# Altium PCB PCB1.PcbDoc (part 1 of 2)
Units mm, origin at the board's own origin, x right, y up, seen from the top; angles counter-clockwise.
Board outline 42.41 x 25.14 mm, 2 copper layers (Top Layer, Bottom Layer); 357 components, 11 nets, 765 pads, 0 vias.
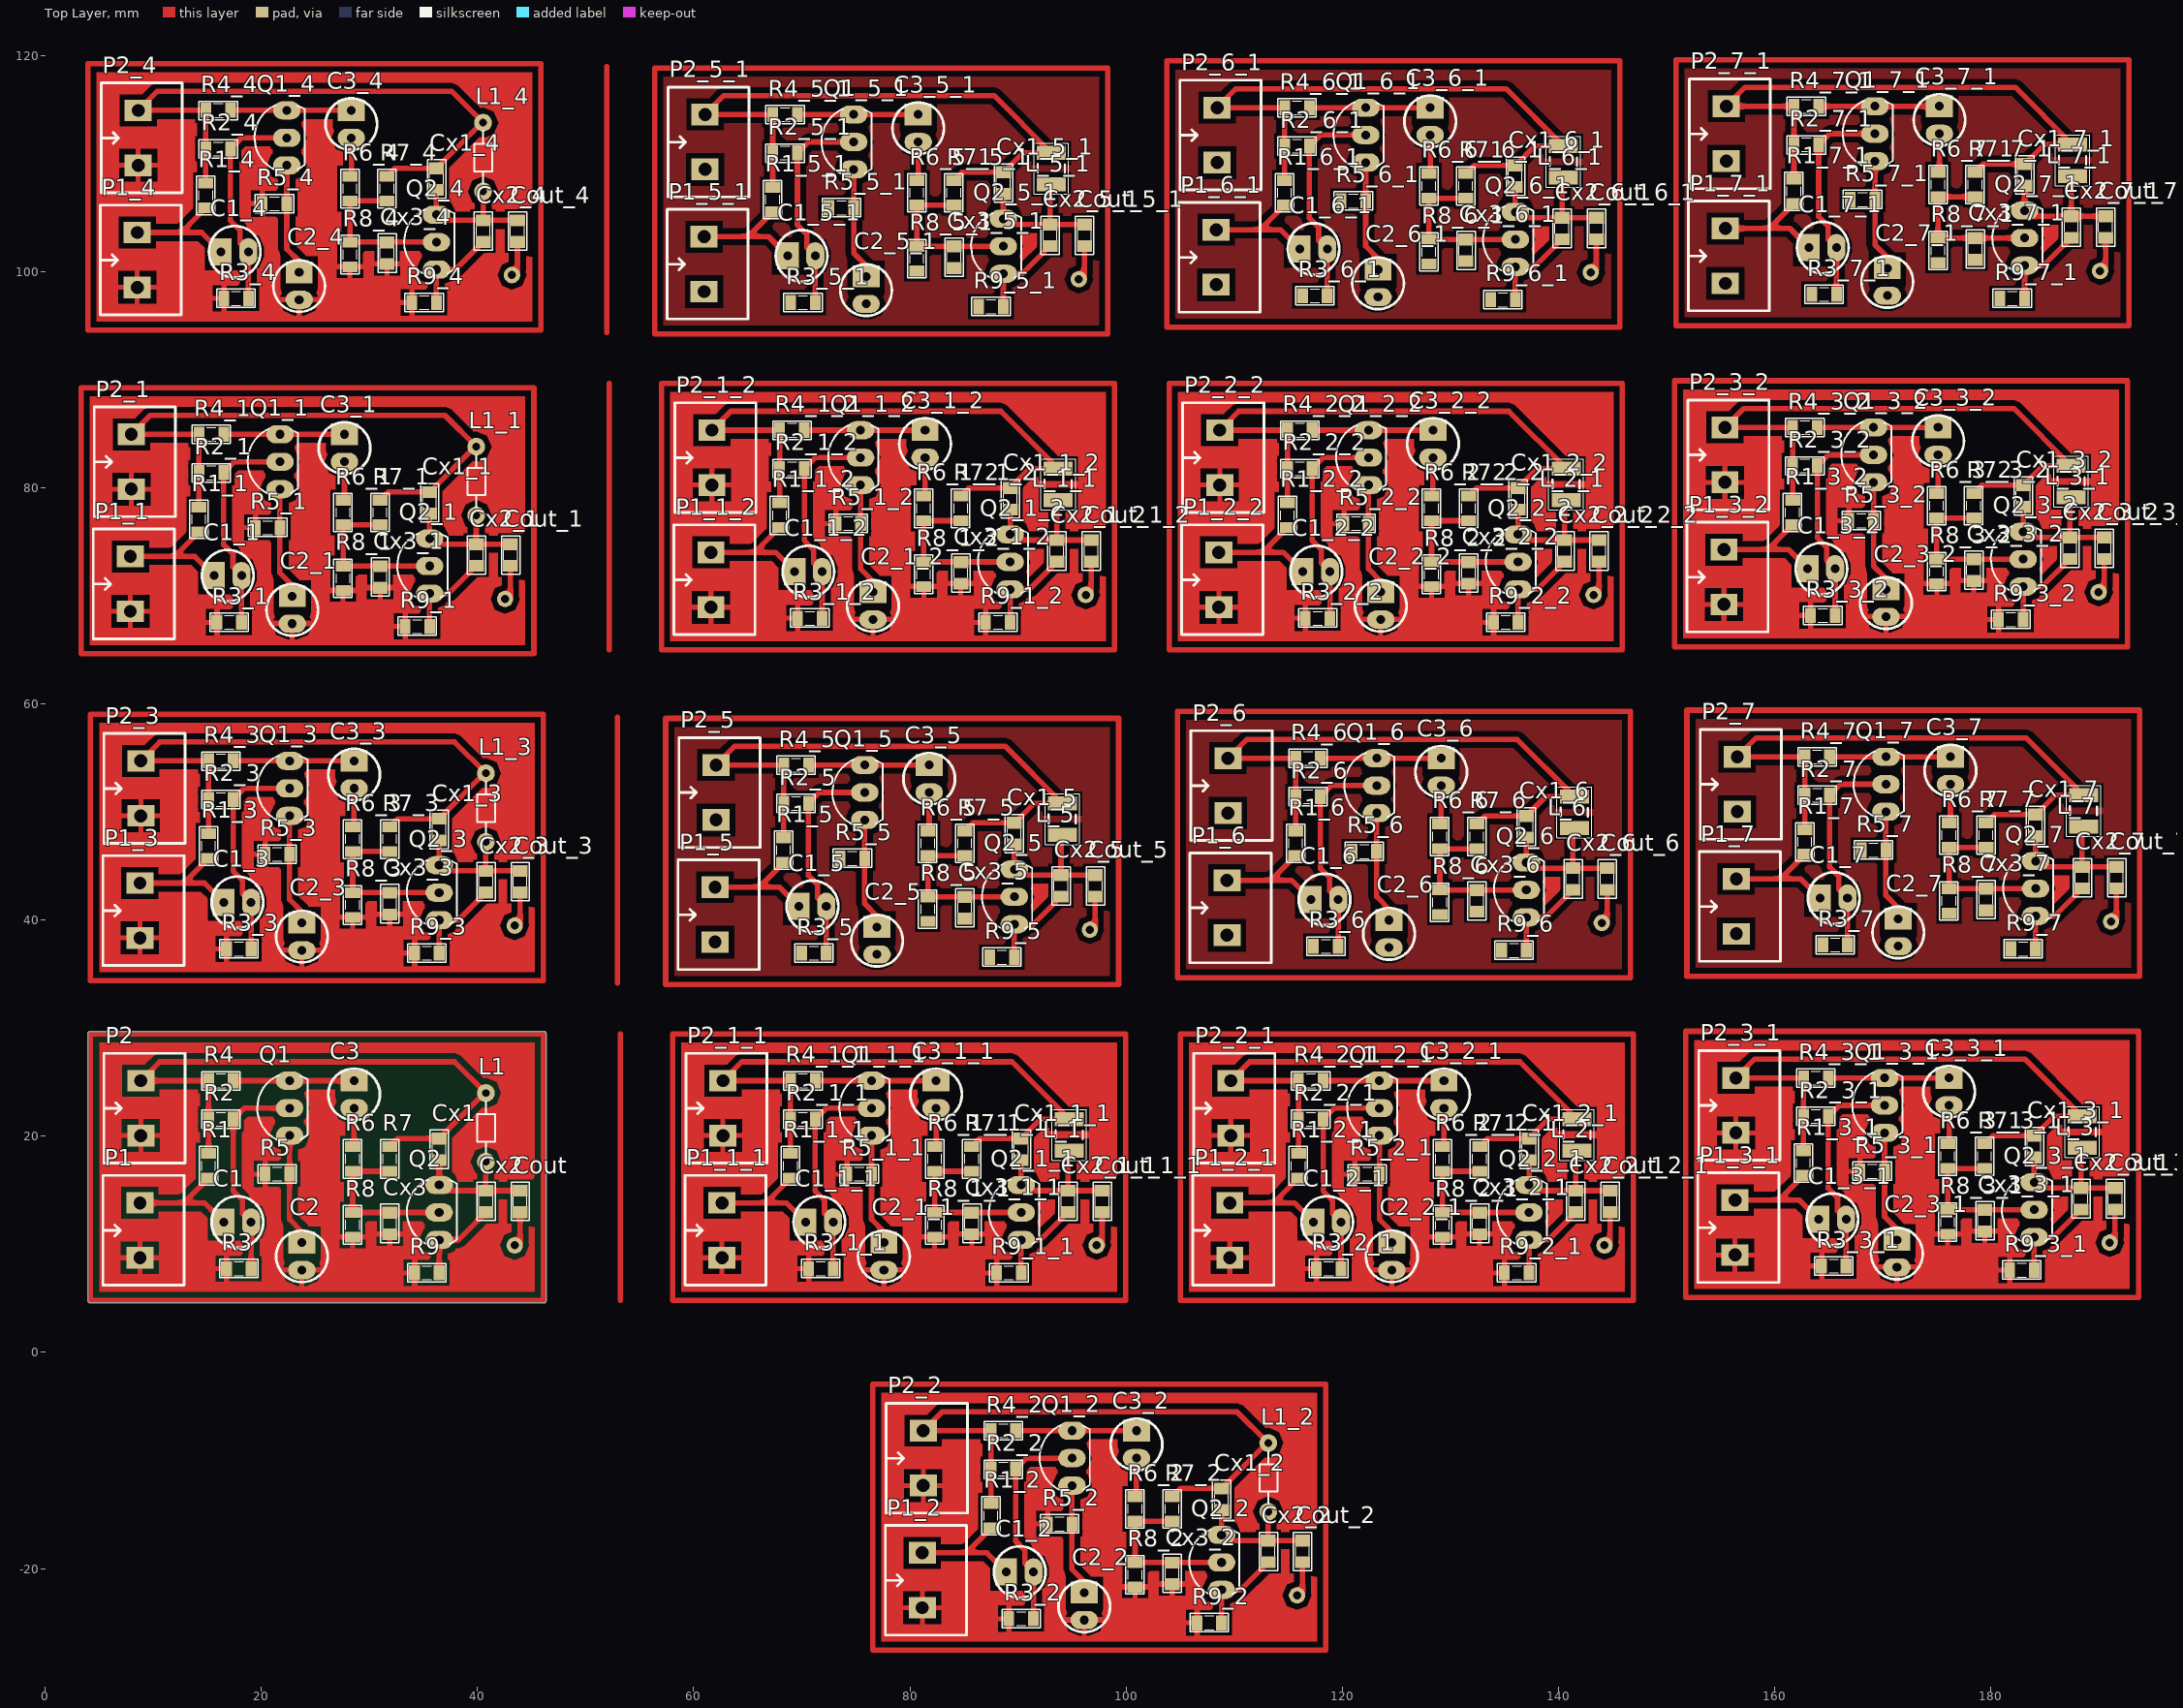
[diagram p0: Top Layer view]
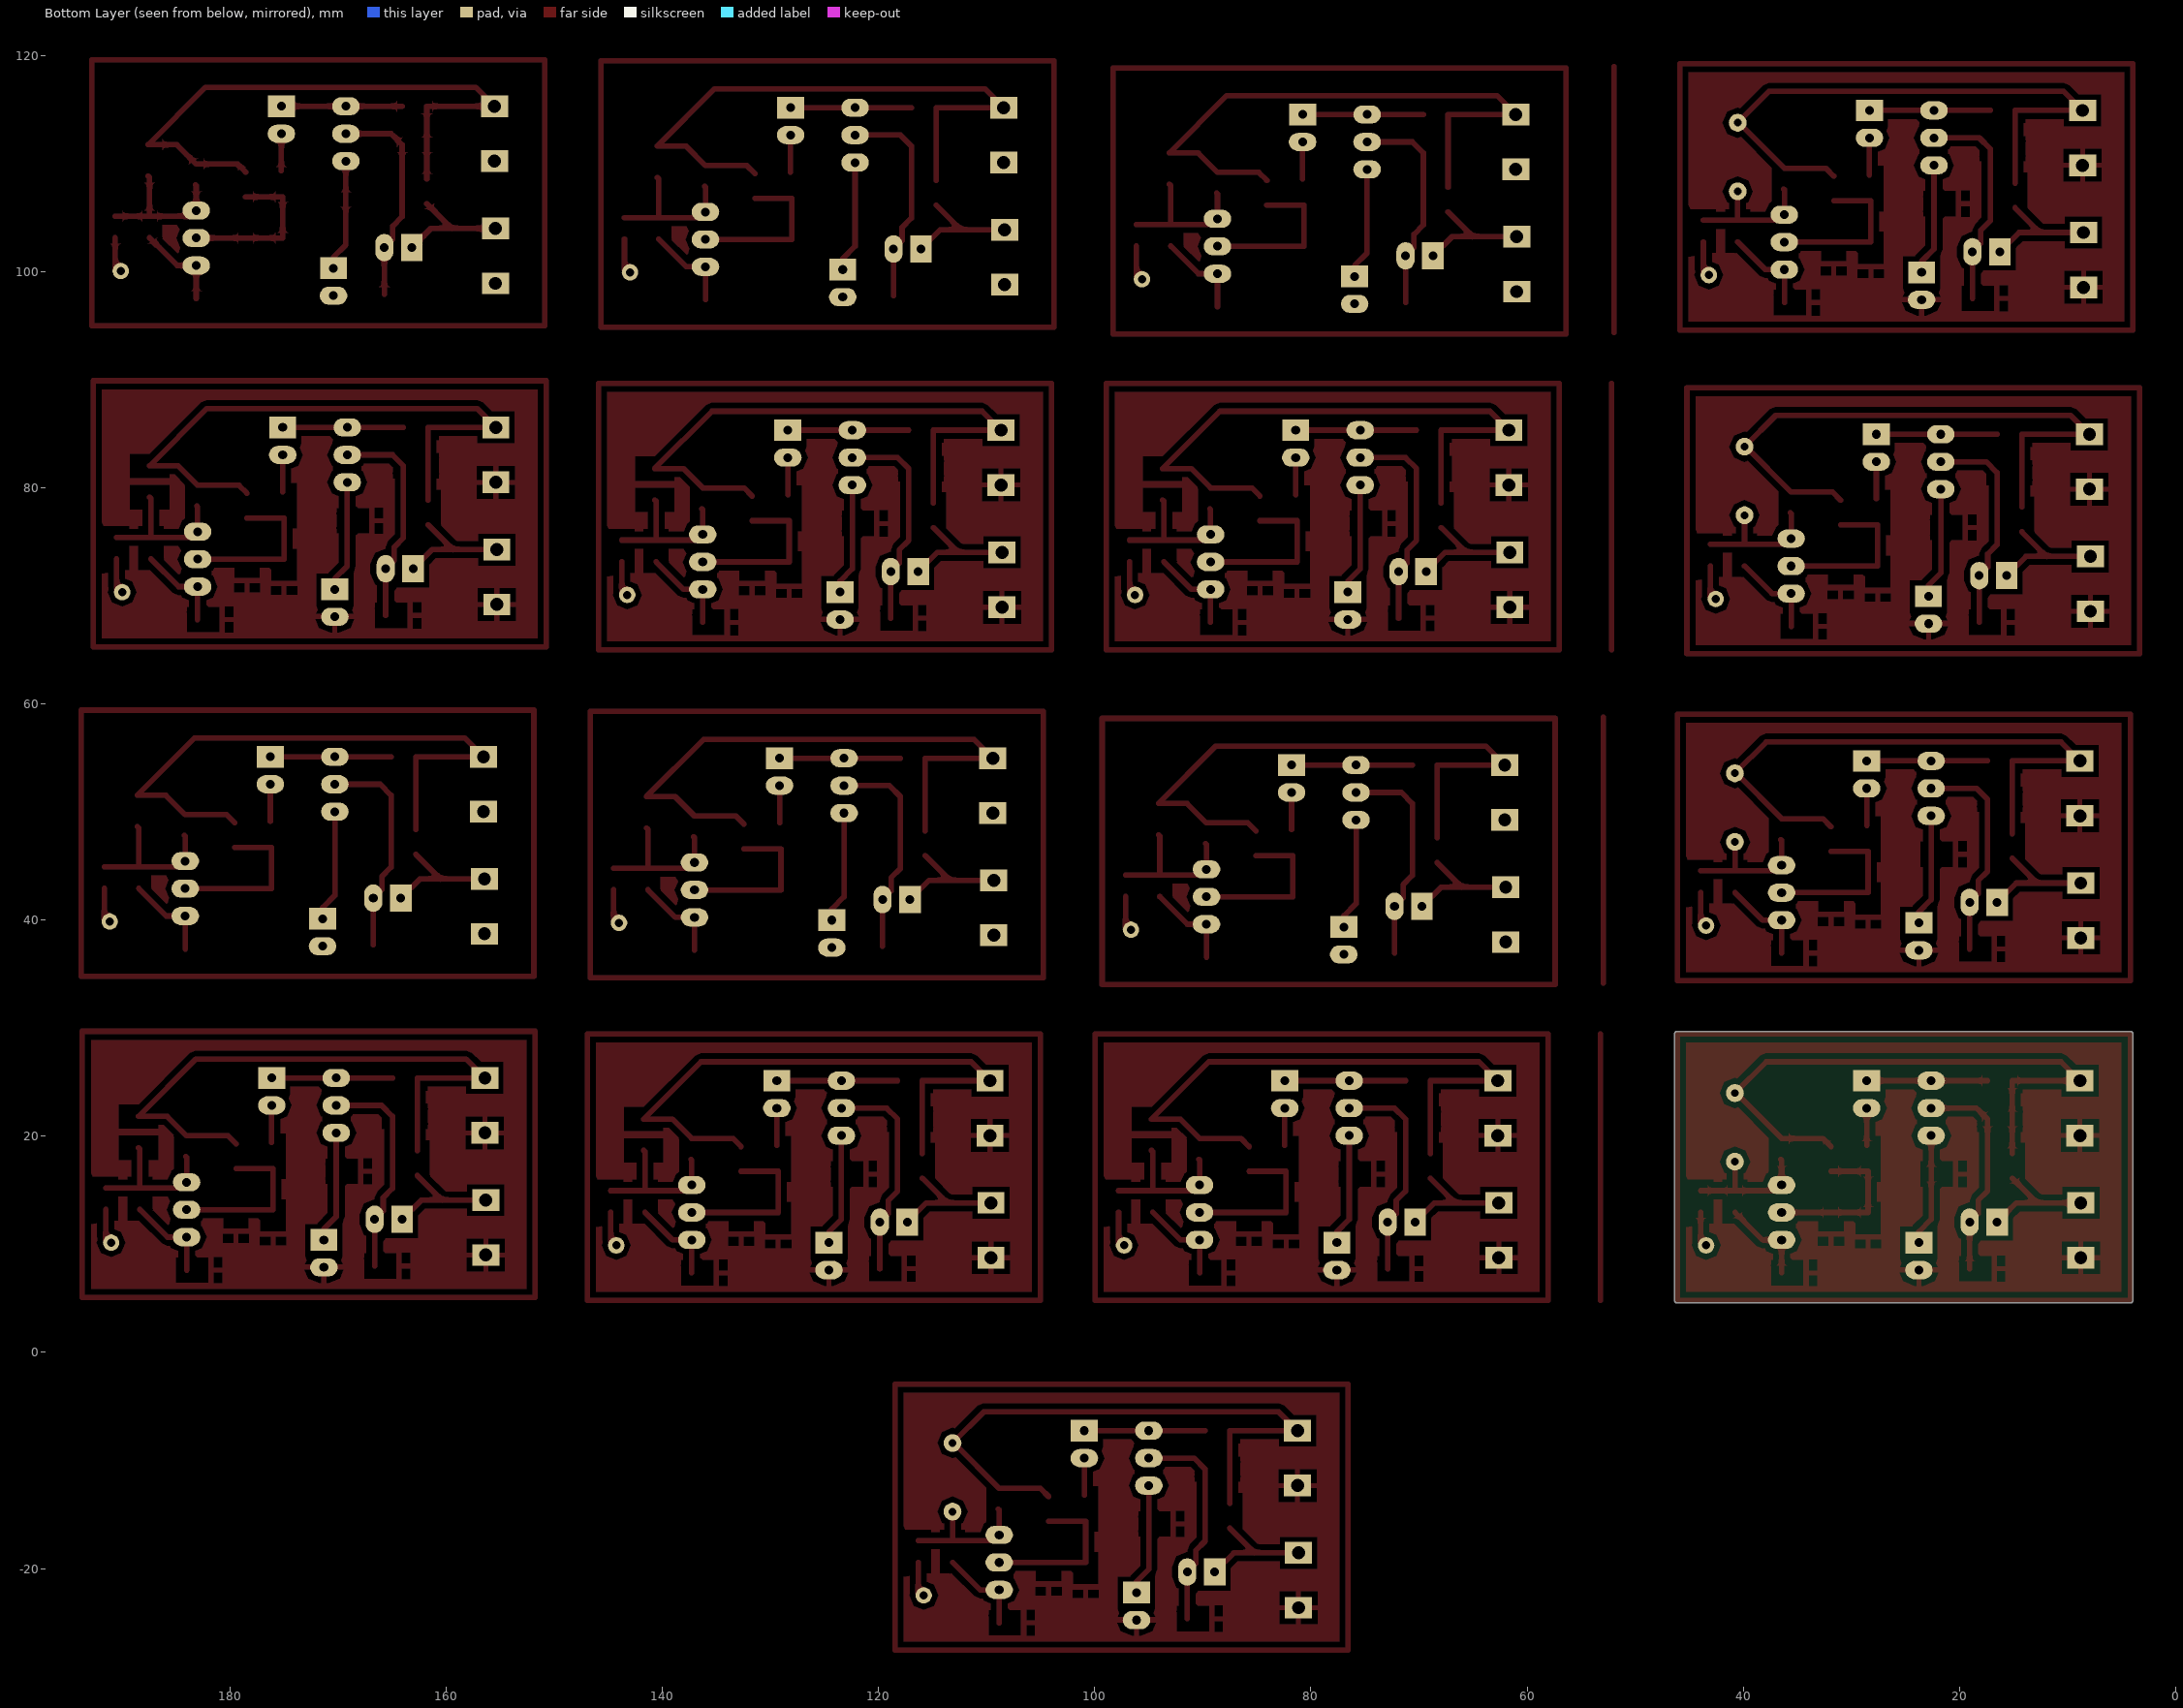
[diagram p1: Bottom Layer view, seen from below]

## Layer stack, top to bottom
Top Solder: solder mask 0.0102, Solder Resist, Dk 3.5
Top Layer: signal copper 0.0356
Dielectric 1: dielectric 0.32, FR-4, Dk 4.8
Bottom Layer: signal copper 0.0356
Bottom Solder: solder mask 0.0102, Solder Resist, Dk 3.5

## Board outline
4.191,4.576 cw(c4.191,4.826) 3.941,4.826 3.941,29.464 cw(c4.191,29.464) 4.191,29.714 46.101,29.714 cw(c46.101,29.464) 46.351,29.464 46.351,4.826 cw(c46.101,4.826) 46.101,4.576

## Design rules (kind name [scope] priority, off if disabled: settings)
Clearance [All] p1: gap=0.5
PlaneConnect [All] p1: planeconnectstyle=Relief reliefexpansion=0.508 reliefentries=4 reliefconductorwidth=5 reliefairgap=0.254
PolygonConnect [All] p1: connectstyle=Relief reliefconductorwidth=0.5 reliefentries=4 polygonreliefangle="90 Angle" airgapwidth=0.5
RoutingVias [All] p1: holewidth=0.711 width=1.27 viastyle="Through Hole" minholewidth=0.711 minwidth=1.27 maxholewidth=0.711 maxwidth=1.27
SolderMaskExpansion [All] p1: expansion=0.102
Width [All] p1: maxlimit=0.8 minlimit=0.5 preferedwidth=0.5
29 further rules are at their usual default settings.

## Classes and differential pairs
component class Sche: C1 C2 C3 Cout Cx1 Cx2 Cx3 L1 P1 P2 Q1 Q2 R1 R2 R3 R4 R5 R6 R7 R8 R9

## Components (designator, comment, footprint, x,y, rotation, side; value= is the part's Value field where it differs from the comment)
C1 "10u" CA-ALU-2.54 17.78,12.065 r0 top
C1_1 "10u" CA-ALU-2.54 16.891,71.882 r0 top (schematic designator C1)
C1_1_1 "10u" CA-ALU-2.54 71.628,12.065 r0 top (schematic designator C1)
C1_1_2 "10u" CA-ALU-2.54 70.612,72.263 r0 top (schematic designator C1)
C1_2 "10u" CA-ALU-2.54 90.17,-20.32 r0 top (schematic designator C1)
C1_2_1 "10u" CA-ALU-2.54 118.618,12.065 r0 top (schematic designator C1)
C1_2_2 "10u" CA-ALU-2.54 117.602,72.263 r0 top (schematic designator C1)
C1_3 "10u" CA-ALU-2.54 17.78,41.656 r0 top (schematic designator C1)
C1_3_1 "10u" CA-ALU-2.54 165.354,12.319 r0 top (schematic designator C1)
C1_3_2 "10u" CA-ALU-2.54 164.338,72.517 r0 top (schematic designator C1)
C1_4 "10u" CA-ALU-2.54 17.526,101.854 r0 top (schematic designator C1)
C1_5 "10u" CA-ALU-2.54 70.993,41.275 r0 top (schematic designator C1)
C1_5_1 "10u" CA-ALU-2.54 69.977,101.473 r0 top (schematic designator C1)
C1_6 "10u" CA-ALU-2.54 118.364,41.91 r0 top (schematic designator C1)
C1_6_1 "10u" CA-ALU-2.54 117.348,102.108 r0 top (schematic designator C1)
C1_7 "10u" CA-ALU-2.54 165.481,42.037 r0 top (schematic designator C1)
C1_7_1 "10u" CA-ALU-2.54 164.465,102.235 r0 top (schematic designator C1)
C2 "47n" CA-ALU-2.54 23.749,8.89 r270 top
C2_1 "47n" CA-ALU-2.54 22.86,68.707 r270 top (schematic designator C2)
C2_1_1 "47n" CA-ALU-2.54 77.597,8.89 r270 top (schematic designator C2)
C2_1_2 "47n" CA-ALU-2.54 76.581,69.088 r270 top (schematic designator C2)
C2_2 "47n" CA-ALU-2.54 96.139,-23.495 r270 top (schematic designator C2)
C2_2_1 "47n" CA-ALU-2.54 124.587,8.89 r270 top (schematic designator C2)
C2_2_2 "47n" CA-ALU-2.54 123.571,69.088 r270 top (schematic designator C2)
C2_3 "47n" CA-ALU-2.54 23.749,38.481 r270 top (schematic designator C2)
C2_3_1 "47n" CA-ALU-2.54 171.323,9.144 r270 top (schematic designator C2)
C2_3_2 "47n" CA-ALU-2.54 170.307,69.342 r270 top (schematic designator C2)
C2_4 "47n" CA-ALU-2.54 23.495,98.679 r270 top (schematic designator C2)
C2_5 "47n" CA-ALU-2.54 76.962,38.1 r270 top (schematic designator C2)
C2_5_1 "47n" CA-ALU-2.54 75.946,98.298 r270 top (schematic designator C2)
C2_6 "47n" CA-ALU-2.54 124.333,38.735 r270 top (schematic designator C2)
C2_6_1 "47n" CA-ALU-2.54 123.317,98.933 r270 top (schematic designator C2)
C2_7 "47n" CA-ALU-2.54 171.45,38.862 r270 top (schematic designator C2)
C2_7_1 "47n" CA-ALU-2.54 170.434,99.06 r270 top (schematic designator C2)
C3 "10u" CA-ALU-2.54 28.575,23.876 r270 top
C3_1 "10u" CA-ALU-2.54 27.686,83.693 r270 top (schematic designator C3)
C3_1_1 "10u" CA-ALU-2.54 82.423,23.876 r270 top (schematic designator C3)
C3_1_2 "10u" CA-ALU-2.54 81.407,84.074 r270 top (schematic designator C3)
C3_2 "10u" CA-ALU-2.54 100.965,-8.509 r270 top (schematic designator C3)
C3_2_1 "10u" CA-ALU-2.54 129.413,23.876 r270 top (schematic designator C3)
C3_2_2 "10u" CA-ALU-2.54 128.397,84.074 r270 top (schematic designator C3)
C3_3 "10u" CA-ALU-2.54 28.575,53.467 r270 top (schematic designator C3)
C3_3_1 "10u" CA-ALU-2.54 176.149,24.13 r270 top (schematic designator C3)
C3_3_2 "10u" CA-ALU-2.54 175.133,84.328 r270 top (schematic designator C3)
C3_4 "10u" CA-ALU-2.54 28.321,113.665 r270 top (schematic designator C3)
C3_5 "10u" CA-ALU-2.54 81.788,53.086 r270 top (schematic designator C3)
C3_5_1 "10u" CA-ALU-2.54 80.772,113.284 r270 top (schematic designator C3)
C3_6 "10u" CA-ALU-2.54 129.159,53.721 r270 top (schematic designator C3)
C3_6_1 "10u" CA-ALU-2.54 128.143,113.919 r270 top (schematic designator C3)
C3_7 "10u" CA-ALU-2.54 176.276,53.848 r270 top (schematic designator C3)
C3_7_1 "10u" CA-ALU-2.54 175.26,114.046 r270 top (schematic designator C3)
Cout "33pF" CN-SMD-0805 43.942,13.97 r90 top
Cout_1 "33pF" CN-SMD-0805 43.053,73.787 r90 top (schematic designator Cout)
Cout_1_1 "33pF" CN-SMD-0805 97.79,13.97 r90 top (schematic designator Cout)
Cout_1_2 "33pF" CN-SMD-0805 96.774,74.168 r90 top (schematic designator Cout)
Cout_2 "33pF" CN-SMD-0805 116.332,-18.415 r90 top (schematic designator Cout)
Cout_2_1 "33pF" CN-SMD-0805 144.78,13.97 r90 top (schematic designator Cout)
Cout_2_2 "33pF" CN-SMD-0805 143.764,74.168 r90 top (schematic designator Cout)
Cout_3 "33pF" CN-SMD-0805 43.942,43.561 r90 top (schematic designator Cout)
Cout_3_1 "33pF" CN-SMD-0805 191.516,14.224 r90 top (schematic designator Cout)
Cout_3_2 "33pF" CN-SMD-0805 190.5,74.422 r90 top (schematic designator Cout)
Cout_4 "33pF" CN-SMD-0805 43.688,103.759 r90 top (schematic designator Cout)
Cout_5 "33pF" CN-SMD-0805 97.155,43.18 r90 top (schematic designator Cout)
Cout_5_1 "33pF" CN-SMD-0805 96.139,103.378 r90 top (schematic designator Cout)
Cout_6 "33pF" CN-SMD-0805 144.526,43.815 r90 top (schematic designator Cout)
Cout_6_1 "33pF" CN-SMD-0805 143.51,104.013 r90 top (schematic designator Cout)
Cout_7 "33pF" CN-SMD-0805 191.643,43.942 r90 top (schematic designator Cout)
Cout_7_1 "33pF" CN-SMD-0805 190.627,104.14 r90 top (schematic designator Cout)
Cx1 "3pF" CN-SMD-0805 36.449,18.796 r90 top
Cx1_1 "3pF" CN-SMD-0805 35.56,78.613 r90 top (schematic designator Cx1)
Cx1_1_1 "3pF" CN-SMD-0805 90.297,18.796 r90 top (schematic designator Cx1)
Cx1_1_2 "3pF" CN-SMD-0805 89.281,78.994 r90 top (schematic designator Cx1)
Cx1_2 "3pF" CN-SMD-0805 108.839,-13.589 r90 top (schematic designator Cx1)
Cx1_2_1 "3pF" CN-SMD-0805 137.287,18.796 r90 top (schematic designator Cx1)
Cx1_2_2 "3pF" CN-SMD-0805 136.271,78.994 r90 top (schematic designator Cx1)
Cx1_3 "3pF" CN-SMD-0805 36.449,48.387 r90 top (schematic designator Cx1)
Cx1_3_1 "3pF" CN-SMD-0805 184.023,19.05 r90 top (schematic designator Cx1)
Cx1_3_2 "3pF" CN-SMD-0805 183.007,79.248 r90 top (schematic designator Cx1)
Cx1_4 "3pF" CN-SMD-0805 36.195,108.585 r90 top (schematic designator Cx1)
Cx1_5 "3pF" CN-SMD-0805 89.662,48.006 r90 top (schematic designator Cx1)
Cx1_5_1 "3pF" CN-SMD-0805 88.646,108.204 r90 top (schematic designator Cx1)
Cx1_6 "3pF" CN-SMD-0805 137.033,48.641 r90 top (schematic designator Cx1)
Cx1_6_1 "3pF" CN-SMD-0805 136.017,108.839 r90 top (schematic designator Cx1)
Cx1_7 "3pF" CN-SMD-0805 184.15,48.768 r90 top (schematic designator Cx1)
Cx1_7_1 "3pF" CN-SMD-0805 183.134,108.966 r90 top (schematic designator Cx1)
Cx2 "33pF" CN-SMD-0805 40.767,13.97 r90 top
Cx2_1 "33pF" CN-SMD-0805 39.878,73.787 r90 top (schematic designator Cx2)
Cx2_1_1 "33pF" CN-SMD-0805 94.615,13.97 r90 top (schematic designator Cx2)
Cx2_1_2 "33pF" CN-SMD-0805 93.599,74.168 r90 top (schematic designator Cx2)
Cx2_2 "33pF" CN-SMD-0805 113.157,-18.415 r90 top (schematic designator Cx2)
Cx2_2_1 "33pF" CN-SMD-0805 141.605,13.97 r90 top (schematic designator Cx2)
Cx2_2_2 "33pF" CN-SMD-0805 140.589,74.168 r90 top (schematic designator Cx2)
Cx2_3 "33pF" CN-SMD-0805 40.767,43.561 r90 top (schematic designator Cx2)
Cx2_3_1 "33pF" CN-SMD-0805 188.341,14.224 r90 top (schematic designator Cx2)
Cx2_3_2 "33pF" CN-SMD-0805 187.325,74.422 r90 top (schematic designator Cx2)
Cx2_4 "33pF" CN-SMD-0805 40.513,103.759 r90 top (schematic designator Cx2)
Cx2_5 "33pF" CN-SMD-0805 93.98,43.18 r90 top (schematic designator Cx2)
Cx2_5_1 "33pF" CN-SMD-0805 92.964,103.378 r90 top (schematic designator Cx2)
Cx2_6 "33pF" CN-SMD-0805 141.351,43.815 r90 top (schematic designator Cx2)
Cx2_6_1 "33pF" CN-SMD-0805 140.335,104.013 r90 top (schematic designator Cx2)
Cx2_7 "33pF" CN-SMD-0805 188.468,43.942 r90 top (schematic designator Cx2)
Cx2_7_1 "33pF" CN-SMD-0805 187.452,104.14 r90 top (schematic designator Cx2)
Cx3 "3pF" CN-SMD-0805 31.877,11.938 r90 top
Cx3_1 "3pF" CN-SMD-0805 30.988,71.755 r90 top (schematic designator Cx3)
Cx3_1_1 "3pF" CN-SMD-0805 85.725,11.938 r90 top (schematic designator Cx3)
Cx3_1_2 "3pF" CN-SMD-0805 84.709,72.136 r90 top (schematic designator Cx3)
Cx3_2 "3pF" CN-SMD-0805 104.267,-20.447 r90 top (schematic designator Cx3)
Cx3_2_1 "3pF" CN-SMD-0805 132.715,11.938 r90 top (schematic designator Cx3)
Cx3_2_2 "3pF" CN-SMD-0805 131.699,72.136 r90 top (schematic designator Cx3)
Cx3_3 "3pF" CN-SMD-0805 31.877,41.529 r90 top (schematic designator Cx3)
Cx3_3_1 "3pF" CN-SMD-0805 179.451,12.192 r90 top (schematic designator Cx3)
Cx3_3_2 "3pF" CN-SMD-0805 178.435,72.39 r90 top (schematic designator Cx3)
Cx3_4 "3pF" CN-SMD-0805 31.623,101.727 r90 top (schematic designator Cx3)
Cx3_5 "3pF" CN-SMD-0805 85.09,41.148 r90 top (schematic designator Cx3)
Cx3_5_1 "3pF" CN-SMD-0805 84.074,101.346 r90 top (schematic designator Cx3)
Cx3_6 "3pF" CN-SMD-0805 132.461,41.783 r90 top (schematic designator Cx3)
Cx3_6_1 "3pF" CN-SMD-0805 131.445,101.981 r90 top (schematic designator Cx3)
Cx3_7 "3pF" CN-SMD-0805 179.578,41.91 r90 top (schematic designator Cx3)
Cx3_7_1 "3pF" CN-SMD-0805 178.562,102.108 r90 top (schematic designator Cx3)
L1 "150n" RES-1/8W-SMALL 40.767,20.828 r270 top
L1_1 "150n" RES-1/8W-SMALL 39.878,80.645 r270 top (schematic designator L1)
L1_2 "150n" RES-1/8W-SMALL 113.157,-11.557 r270 top (schematic designator L1)
L1_3 "150n" RES-1/8W-SMALL 40.767,50.419 r270 top (schematic designator L1)
L1_4 "150n" RES-1/8W-SMALL 40.513,110.617 r270 top (schematic designator L1)
L_1 "150n" RES-SMD-1210 94.742,20.193 r270 top (schematic designator L)
L_1_1 "150n" RES-SMD-1210 93.726,80.391 r270 top (schematic designator L)
L_2 "150n" RES-SMD-1210 141.732,20.193 r270 top (schematic designator L)
L_2_1 "150n" RES-SMD-1210 140.716,80.391 r270 top (schematic designator L)
L_3 "150n" RES-SMD-1210 188.468,20.447 r270 top (schematic designator L)
L_3_1 "150n" RES-SMD-1210 187.452,80.645 r270 top (schematic designator L)
L_5 "150n" RES-SMD-1210 94.107,49.403 r270 top (schematic designator L)
L_5_1 "150n" RES-SMD-1210 93.091,109.601 r270 top (schematic designator L)
L_6 "150n" RES-SMD-1210 141.478,50.038 r270 top (schematic designator L)
L_6_1 "150n" RES-SMD-1210 140.462,110.236 r270 top (schematic designator L)
L_7 "150n" RES-SMD-1210 188.595,50.165 r270 top (schematic designator L)
L_7_1 "150n" RES-SMD-1210 187.579,110.363 r270 top (schematic designator L)
P1 "Domino 2" "DOMINO 2- 5mm" 8.763,11.303 r90 top
P1_1 "Domino 2" "DOMINO 2- 5mm" 7.874,71.12 r90 top (schematic designator P1)
P1_1_1 "Domino 2" "DOMINO 2- 5mm" 62.611,11.303 r90 top (schematic designator P1)
P1_1_2 "Domino 2" "DOMINO 2- 5mm" 61.595,71.501 r90 top (schematic designator P1)
P1_2 "Domino 2" "DOMINO 2- 5mm" 81.153,-21.082 r90 top (schematic designator P1)
P1_2_1 "Domino 2" "DOMINO 2- 5mm" 109.601,11.303 r90 top (schematic designator P1)
P1_2_2 "Domino 2" "DOMINO 2- 5mm" 108.585,71.501 r90 top (schematic designator P1)
P1_3 "Domino 2" "DOMINO 2- 5mm" 8.763,40.894 r90 top (schematic designator P1)
P1_3_1 "Domino 2" "DOMINO 2- 5mm" 156.337,11.557 r90 top (schematic designator P1)
P1_3_2 "Domino 2" "DOMINO 2- 5mm" 155.321,71.755 r90 top (schematic designator P1)
P1_4 "Domino 2" "DOMINO 2- 5mm" 8.509,101.092 r90 top (schematic designator P1)
P1_5 "Domino 2" "DOMINO 2- 5mm" 61.976,40.513 r90 top (schematic designator P1)
P1_5_1 "Domino 2" "DOMINO 2- 5mm" 60.96,100.711 r90 top (schematic designator P1)
P1_6 "Domino 2" "DOMINO 2- 5mm" 109.347,41.148 r90 top (schematic designator P1)
P1_6_1 "Domino 2" "DOMINO 2- 5mm" 108.331,101.346 r90 top (schematic designator P1)
P1_7 "Domino 2" "DOMINO 2- 5mm" 156.464,41.275 r90 top (schematic designator P1)
P1_7_1 "Domino 2" "DOMINO 2- 5mm" 155.448,101.473 r90 top (schematic designator P1)
P2 "Domino 2" "DOMINO 2- 5mm" 8.851,22.606 r90 top
P2_1 "Domino 2" "DOMINO 2- 5mm" 7.962,82.423 r90 top (schematic designator P2)
P2_1_1 "Domino 2" "DOMINO 2- 5mm" 62.699,22.606 r90 top (schematic designator P2)
P2_1_2 "Domino 2" "DOMINO 2- 5mm" 61.683,82.804 r90 top (schematic designator P2)
P2_2 "Domino 2" "DOMINO 2- 5mm" 81.241,-9.779 r90 top (schematic designator P2)
P2_2_1 "Domino 2" "DOMINO 2- 5mm" 109.689,22.606 r90 top (schematic designator P2)
P2_2_2 "Domino 2" "DOMINO 2- 5mm" 108.673,82.804 r90 top (schematic designator P2)
P2_3 "Domino 2" "DOMINO 2- 5mm" 8.851,52.197 r90 top (schematic designator P2)
P2_3_1 "Domino 2" "DOMINO 2- 5mm" 156.425,22.86 r90 top (schematic designator P2)
P2_3_2 "Domino 2" "DOMINO 2- 5mm" 155.409,83.058 r90 top (schematic designator P2)
P2_4 "Domino 2" "DOMINO 2- 5mm" 8.597,112.395 r90 top (schematic designator P2)
P2_5 "Domino 2" "DOMINO 2- 5mm" 62.064,51.816 r90 top (schematic designator P2)
P2_5_1 "Domino 2" "DOMINO 2- 5mm" 61.048,112.014 r90 top (schematic designator P2)
P2_6 "Domino 2" "DOMINO 2- 5mm" 109.435,52.451 r90 top (schematic designator P2)
P2_6_1 "Domino 2" "DOMINO 2- 5mm" 108.419,112.649 r90 top (schematic designator P2)
P2_7 "Domino 2" "DOMINO 2- 5mm" 156.552,52.578 r90 top (schematic designator P2)
P2_7_1 "Domino 2" "DOMINO 2- 5mm" 155.536,112.776 r90 top (schematic designator P2)
Q1 "2N222" TO92-123 22.606,22.606 r90 top
Q1_1 "2N222" TO92-123 21.717,82.423 r90 top (schematic designator Q1)
Q1_1_1 "2N222" TO92-123 76.454,22.606 r90 top (schematic designator Q1)
Q1_1_2 "2N222" TO92-123 75.438,82.804 r90 top (schematic designator Q1)
Q1_2 "2N222" TO92-123 94.996,-9.779 r90 top (schematic designator Q1)
Q1_2_1 "2N222" TO92-123 123.444,22.606 r90 top (schematic designator Q1)
Q1_2_2 "2N222" TO92-123 122.428,82.804 r90 top (schematic designator Q1)
Q1_3 "2N222" TO92-123 22.606,52.197 r90 top (schematic designator Q1)
Q1_3_1 "2N222" TO92-123 170.18,22.86 r90 top (schematic designator Q1)
Q1_3_2 "2N222" TO92-123 169.164,83.058 r90 top (schematic designator Q1)
Q1_4 "2N222" TO92-123 22.352,112.395 r90 top (schematic designator Q1)
Q1_5 "2N222" TO92-123 75.819,51.816 r90 top (schematic designator Q1)
Q1_5_1 "2N222" TO92-123 74.803,112.014 r90 top (schematic designator Q1)
Q1_6 "2N222" TO92-123 123.19,52.451 r90 top (schematic designator Q1)
Q1_6_1 "2N222" TO92-123 122.174,112.649 r90 top (schematic designator Q1)
Q1_7 "2N222" TO92-123 170.307,52.578 r90 top (schematic designator Q1)
Q1_7_1 "2N222" TO92-123 169.291,112.776 r90 top (schematic designator Q1)
Q2 "2N222" TO92-123 36.449,12.954 r90 top
Q2_1 "2N222" TO92-123 35.56,72.771 r90 top (schematic designator Q2)
Q2_1_1 "2N222" TO92-123 90.297,12.954 r90 top (schematic designator Q2)
Q2_1_2 "2N222" TO92-123 89.281,73.152 r90 top (schematic designator Q2)
Q2_2 "2N222" TO92-123 108.839,-19.431 r90 top (schematic designator Q2)
Q2_2_1 "2N222" TO92-123 137.287,12.954 r90 top (schematic designator Q2)
Q2_2_2 "2N222" TO92-123 136.271,73.152 r90 top (schematic designator Q2)
Q2_3 "2N222" TO92-123 36.449,42.545 r90 top (schematic designator Q2)
Q2_3_1 "2N222" TO92-123 184.023,13.208 r90 top (schematic designator Q2)
Q2_3_2 "2N222" TO92-123 183.007,73.406 r90 top (schematic designator Q2)
Q2_4 "2N222" TO92-123 36.195,102.743 r90 top (schematic designator Q2)
Q2_5 "2N222" TO92-123 89.662,42.164 r90 top (schematic designator Q2)
Q2_5_1 "2N222" TO92-123 88.646,102.362 r90 top (schematic designator Q2)
Q2_6 "2N222" TO92-123 137.033,42.799 r90 top (schematic designator Q2)
Q2_6_1 "2N222" TO92-123 136.017,102.997 r90 top (schematic designator Q2)
Q2_7 "2N222" TO92-123 184.15,42.926 r90 top (schematic designator Q2)
Q2_7_1 "2N222" TO92-123 183.134,103.124 r90 top (schematic designator Q2)
R1 "1k" RES-SMD-0805 15.113,17.272 r270 top
R1_1 "1k" RES-SMD-0805 14.224,77.089 r270 top (schematic designator R1)
R1_1_1 "1k" RES-SMD-0805 68.961,17.272 r270 top (schematic designator R1)
R1_1_2 "1k" RES-SMD-0805 67.945,77.47 r270 top (schematic designator R1)
R1_2 "1k" RES-SMD-0805 87.503,-15.113 r270 top (schematic designator R1)
R1_2_1 "1k" RES-SMD-0805 115.951,17.272 r270 top (schematic designator R1)
R1_2_2 "1k" RES-SMD-0805 114.935,77.47 r270 top (schematic designator R1)
R1_3 "1k" RES-SMD-0805 15.113,46.863 r270 top (schematic designator R1)
R1_3_1 "1k" RES-SMD-0805 162.687,17.526 r270 top (schematic designator R1)
R1_3_2 "1k" RES-SMD-0805 161.671,77.724 r270 top (schematic designator R1)
R1_4 "1k" RES-SMD-0805 14.859,107.061 r270 top (schematic designator R1)
R1_5 "1k" RES-SMD-0805 68.326,46.482 r270 top (schematic designator R1)
R1_5_1 "1k" RES-SMD-0805 67.31,106.68 r270 top (schematic designator R1)
R1_6 "1k" RES-SMD-0805 115.697,47.117 r270 top (schematic designator R1)
R1_6_1 "1k" RES-SMD-0805 114.681,107.315 r270 top (schematic designator R1)
R1_7 "1k" RES-SMD-0805 162.814,47.244 r270 top (schematic designator R1)
R1_7_1 "1k" RES-SMD-0805 161.798,107.442 r270 top (schematic designator R1)
R2 "15k" RES-SMD-0805 16.256,21.59 r0 top
R2_1 "15k" RES-SMD-0805 15.367,81.407 r0 top (schematic designator R2)
R2_1_1 "15k" RES-SMD-0805 70.104,21.59 r0 top (schematic designator R2)
R2_1_2 "15k" RES-SMD-0805 69.088,81.788 r0 top (schematic designator R2)
R2_2 "15k" RES-SMD-0805 88.646,-10.795 r0 top (schematic designator R2)
R2_2_1 "15k" RES-SMD-0805 117.094,21.59 r0 top (schematic designator R2)
R2_2_2 "15k" RES-SMD-0805 116.078,81.788 r0 top (schematic designator R2)
R2_3 "15k" RES-SMD-0805 16.256,51.181 r0 top (schematic designator R2)
R2_3_1 "15k" RES-SMD-0805 163.83,21.844 r0 top (schematic designator R2)
R2_3_2 "15k" RES-SMD-0805 162.814,82.042 r0 top (schematic designator R2)
R2_4 "15k" RES-SMD-0805 16.002,111.379 r0 top (schematic designator R2)
R2_5 "15k" RES-SMD-0805 69.469,50.8 r0 top (schematic designator R2)
R2_5_1 "15k" RES-SMD-0805 68.453,110.998 r0 top (schematic designator R2)
R2_6 "15k" RES-SMD-0805 116.84,51.435 r0 top (schematic designator R2)
R2_6_1 "15k" RES-SMD-0805 115.824,111.633 r0 top (schematic designator R2)
R2_7 "15k" RES-SMD-0805 163.957,51.562 r0 top (schematic designator R2)
R2_7_1 "15k" RES-SMD-0805 162.941,111.76 r0 top (schematic designator R2)
R3 "6.8k" RES-SMD-0805 17.907,7.747 r180 top
R3_1 "6.8k" RES-SMD-0805 17.018,67.564 r180 top (schematic designator R3)
R3_1_1 "6.8k" RES-SMD-0805 71.755,7.747 r180 top (schematic designator R3)
R3_1_2 "6.8k" RES-SMD-0805 70.739,67.945 r180 top (schematic designator R3)
R3_2 "6.8k" RES-SMD-0805 90.297,-24.638 r180 top (schematic designator R3)
R3_2_1 "6.8k" RES-SMD-0805 118.745,7.747 r180 top (schematic designator R3)
R3_2_2 "6.8k" RES-SMD-0805 117.729,67.945 r180 top (schematic designator R3)
R3_3 "6.8k" RES-SMD-0805 17.907,37.338 r180 top (schematic designator R3)
R3_3_1 "6.8k" RES-SMD-0805 165.481,8.001 r180 top (schematic designator R3)
R3_3_2 "6.8k" RES-SMD-0805 164.465,68.199 r180 top (schematic designator R3)
R3_4 "6.8k" RES-SMD-0805 17.653,97.536 r180 top (schematic designator R3)
R3_5 "6.8k" RES-SMD-0805 71.12,36.957 r180 top (schematic designator R3)
R3_5_1 "6.8k" RES-SMD-0805 70.104,97.155 r180 top (schematic designator R3)
R3_6 "6.8k" RES-SMD-0805 118.491,37.592 r180 top (schematic designator R3)
R3_6_1 "6.8k" RES-SMD-0805 117.475,97.79 r180 top (schematic designator R3)
R3_7 "6.8k" RES-SMD-0805 165.608,37.719 r180 top (schematic designator R3)
R3_7_1 "6.8k" RES-SMD-0805 164.592,97.917 r180 top (schematic designator R3)
R4 "10k" RES-SMD-0805 16.256,25.146 r0 top
R4_1 "10k" RES-SMD-0805 15.367,84.963 r0 top (schematic designator R4)
R4_1_1 "10k" RES-SMD-0805 70.104,25.146 r0 top (schematic designator R4)
R4_1_2 "10k" RES-SMD-0805 69.088,85.344 r0 top (schematic designator R4)
R4_2 "10k" RES-SMD-0805 88.646,-7.239 r0 top (schematic designator R4)
R4_2_1 "10k" RES-SMD-0805 117.094,25.146 r0 top (schematic designator R4)
R4_2_2 "10k" RES-SMD-0805 116.078,85.344 r0 top (schematic designator R4)
R4_3 "10k" RES-SMD-0805 16.256,54.737 r0 top (schematic designator R4)
R4_3_1 "10k" RES-SMD-0805 163.83,25.4 r0 top (schematic designator R4)
R4_3_2 "10k" RES-SMD-0805 162.814,85.598 r0 top (schematic designator R4)
R4_4 "10k" RES-SMD-0805 16.002,114.935 r0 top (schematic designator R4)
R4_5 "10k" RES-SMD-0805 69.469,54.356 r0 top (schematic designator R4)
R4_5_1 "10k" RES-SMD-0805 68.453,114.554 r0 top (schematic designator R4)
R4_6 "10k" RES-SMD-0805 116.84,54.991 r0 top (schematic designator R4)
R4_6_1 "10k" RES-SMD-0805 115.824,115.189 r0 top (schematic designator R4)
R4_7 "10k" RES-SMD-0805 163.957,55.118 r0 top (schematic designator R4)
R4_7_1 "10k" RES-SMD-0805 162.941,115.316 r0 top (schematic designator R4)
R5 "4.7k" RES-SMD-0805 21.463,16.51 r180 top
R5_1 "4.7k" RES-SMD-0805 20.574,76.327 r180 top (schematic designator R5)
R5_1_1 "4.7k" RES-SMD-0805 75.311,16.51 r180 top (schematic designator R5)
R5_1_2 "4.7k" RES-SMD-0805 74.295,76.708 r180 top (schematic designator R5)
R5_2 "4.7k" RES-SMD-0805 93.853,-15.875 r180 top (schematic designator R5)
R5_2_1 "4.7k" RES-SMD-0805 122.301,16.51 r180 top (schematic designator R5)
R5_2_2 "4.7k" RES-SMD-0805 121.285,76.708 r180 top (schematic designator R5)
R5_3 "4.7k" RES-SMD-0805 21.463,46.101 r180 top (schematic designator R5)
R5_3_1 "4.7k" RES-SMD-0805 169.037,16.764 r180 top (schematic designator R5)
R5_3_2 "4.7k" RES-SMD-0805 168.021,76.962 r180 top (schematic designator R5)
R5_4 "4.7k" RES-SMD-0805 21.209,106.299 r180 top (schematic designator R5)
R5_5 "4.7k" RES-SMD-0805 74.676,45.72 r180 top (schematic designator R5)
R5_5_1 "4.7k" RES-SMD-0805 73.66,105.918 r180 top (schematic designator R5)
R5_6 "4.7k" RES-SMD-0805 122.047,46.355 r180 top (schematic designator R5)
R5_6_1 "4.7k" RES-SMD-0805 121.031,106.553 r180 top (schematic designator R5)
R5_7 "4.7k" RES-SMD-0805 169.164,46.482 r180 top (schematic designator R5)
R5_7_1 "4.7k" RES-SMD-0805 168.148,106.68 r180 top (schematic designator R5)
R6 "1k" RES-SMD-0805 28.448,17.907 r270 top
R6_1 "1k" RES-SMD-0805 27.559,77.724 r270 top (schematic designator R6)
R6_1_1 "1k" RES-SMD-0805 82.296,17.907 r270 top (schematic designator R6)
R6_1_2 "1k" RES-SMD-0805 81.28,78.105 r270 top (schematic designator R6)
R6_2 "1k" RES-SMD-0805 100.838,-14.478 r270 top (schematic designator R6)
R6_2_1 "1k" RES-SMD-0805 129.286,17.907 r270 top (schematic designator R6)
R6_2_2 "1k" RES-SMD-0805 128.27,78.105 r270 top (schematic designator R6)
R6_3 "1k" RES-SMD-0805 28.448,47.498 r270 top (schematic designator R6)
R6_3_1 "1k" RES-SMD-0805 176.022,18.161 r270 top (schematic designator R6)
R6_3_2 "1k" RES-SMD-0805 175.006,78.359 r270 top (schematic designator R6)
R6_4 "1k" RES-SMD-0805 28.194,107.696 r270 top (schematic designator R6)
R6_5 "1k" RES-SMD-0805 81.661,47.117 r270 top (schematic designator R6)
R6_5_1 "1k" RES-SMD-0805 80.645,107.315 r270 top (schematic designator R6)
R6_6 "1k" RES-SMD-0805 129.032,47.752 r270 top (schematic designator R6)
R6_6_1 "1k" RES-SMD-0805 128.016,107.95 r270 top (schematic designator R6)
R6_7 "1k" RES-SMD-0805 176.149,47.879 r270 top (schematic designator R6)
R6_7_1 "1k" RES-SMD-0805 175.133,108.077 r270 top (schematic designator R6)
R7 "4.7k" RES-SMD-0805 31.877,17.907 r270 top
R7_1 "4.7k" RES-SMD-0805 30.988,77.724 r270 top (schematic designator R7)
R7_1_1 "4.7k" RES-SMD-0805 85.725,17.907 r270 top (schematic designator R7)
R7_1_2 "4.7k" RES-SMD-0805 84.709,78.105 r270 top (schematic designator R7)
R7_2 "4.7k" RES-SMD-0805 104.267,-14.478 r270 top (schematic designator R7)
R7_2_1 "4.7k" RES-SMD-0805 132.715,17.907 r270 top (schematic designator R7)
R7_2_2 "4.7k" RES-SMD-0805 131.699,78.105 r270 top (schematic designator R7)
R7_3 "4.7k" RES-SMD-0805 31.877,47.498 r270 top (schematic designator R7)
R7_3_1 "4.7k" RES-SMD-0805 179.451,18.161 r270 top (schematic designator R7)
R7_3_2 "4.7k" RES-SMD-0805 178.435,78.359 r270 top (schematic designator R7)
R7_4 "4.7k" RES-SMD-0805 31.623,107.696 r270 top (schematic designator R7)
R7_5 "4.7k" RES-SMD-0805 85.09,47.117 r270 top (schematic designator R7)
R7_5_1 "4.7k" RES-SMD-0805 84.074,107.315 r270 top (schematic designator R7)
R7_6 "4.7k" RES-SMD-0805 132.461,47.752 r270 top (schematic designator R7)
R7_6_1 "4.7k" RES-SMD-0805 131.445,107.95 r270 top (schematic designator R7)
R7_7 "4.7k" RES-SMD-0805 179.578,47.879 r270 top (schematic designator R7)
R7_7_1 "4.7k" RES-SMD-0805 178.562,108.077 r270 top (schematic designator R7)
R8 "2.2k" RES-SMD-0805 28.448,11.811 r270 top
R8_1 "2.2k" RES-SMD-0805 27.559,71.628 r270 top (schematic designator R8)
R8_1_1 "2.2k" RES-SMD-0805 82.296,11.811 r270 top (schematic designator R8)
R8_1_2 "2.2k" RES-SMD-0805 81.28,72.009 r270 top (schematic designator R8)
R8_2 "2.2k" RES-SMD-0805 100.838,-20.574 r270 top (schematic designator R8)
R8_2_1 "2.2k" RES-SMD-0805 129.286,11.811 r270 top (schematic designator R8)
R8_2_2 "2.2k" RES-SMD-0805 128.27,72.009 r270 top (schematic designator R8)
R8_3 "2.2k" RES-SMD-0805 28.448,41.402 r270 top (schematic designator R8)
R8_3_1 "2.2k" RES-SMD-0805 176.022,12.065 r270 top (schematic designator R8)
R8_3_2 "2.2k" RES-SMD-0805 175.006,72.263 r270 top (schematic designator R8)
R8_4 "2.2k" RES-SMD-0805 28.194,101.6 r270 top (schematic designator R8)
R8_5 "2.2k" RES-SMD-0805 81.661,41.021 r270 top (schematic designator R8)
R8_5_1 "2.2k" RES-SMD-0805 80.645,101.219 r270 top (schematic designator R8)
R8_6 "2.2k" RES-SMD-0805 129.032,41.656 r270 top (schematic designator R8)
R8_6_1 "2.2k" RES-SMD-0805 128.016,101.854 r270 top (schematic designator R8)
R8_7 "2.2k" RES-SMD-0805 176.149,41.783 r270 top (schematic designator R8)
R8_7_1 "2.2k" RES-SMD-0805 175.133,101.981 r270 top (schematic designator R8)
R9 "330" RES-SMD-0805 35.306,7.366 r180 top
R9_1 "330" RES-SMD-0805 34.417,67.183 r180 top (schematic designator R9)
R9_1_1 "330" RES-SMD-0805 89.154,7.366 r180 top (schematic designator R9)
R9_1_2 "330" RES-SMD-0805 88.138,67.564 r180 top (schematic designator R9)
R9_2 "330" RES-SMD-0805 107.696,-25.019 r180 top (schematic designator R9)
R9_2_1 "330" RES-SMD-0805 136.144,7.366 r180 top (schematic designator R9)
R9_2_2 "330" RES-SMD-0805 135.128,67.564 r180 top (schematic designator R9)
R9_3 "330" RES-SMD-0805 35.306,36.957 r180 top (schematic designator R9)
R9_3_1 "330" RES-SMD-0805 182.88,7.62 r180 top (schematic designator R9)
R9_3_2 "330" RES-SMD-0805 181.864,67.818 r180 top (schematic designator R9)
R9_4 "330" RES-SMD-0805 35.052,97.155 r180 top (schematic designator R9)
R9_5 "330" RES-SMD-0805 88.519,36.576 r180 top (schematic designator R9)
R9_5_1 "330" RES-SMD-0805 87.503,96.774 r180 top (schematic designator R9)
R9_6 "330" RES-SMD-0805 135.89,37.211 r180 top (schematic designator R9)
R9_6_1 "330" RES-SMD-0805 134.874,97.409 r180 top (schematic designator R9)
R9_7 "330" RES-SMD-0805 183.007,37.338 r180 top (schematic designator R9)
R9_7_1 "330" RES-SMD-0805 181.991,97.536 r180 top (schematic designator R9)

## Footprints (in the part's own frame and the unit in brackets; to place one, negate y for a bottom-side part, rotate by r counter-clockwise, add the part's x,y. Pads: shape width x height; smd on the part's side, far side on the other; paste and mask are expansions set on the pad)
CA-ALU-2.54 [mm]
  rect 2x2.5 hole 0.813: 1(-1.27,0)
  oval 1.676x2.54 hole 0.813: 2(1.27,0)
  silkscreen extent -2.39,-2.39 2.39,2.39, body extent -2,-2.03 1.99,1.97, height 7.01
CN-SMD-0805 [mm]
  rect 1.1x1.397 smd: 1(-1,0) 2(1,0)
  silkscreen extent -1.78,-0.86 1.78,0.84, body extent -1,-0.62 1,0.63, height 0.8
"DOMINO 2- 5mm" [mm]
  rect 2x2.5 hole 1.2: 1(-2.54,0) 2(2.54,0)
  silkscreen extent -5.08,-4.08 5.08,3.43, body extent -5,-4.07 5,3.43, height 10
RES-1/8W-SMALL [mil] "R 1/8W, 2 pin, 200mil"
  round 65 hole 28: 1(-125,0) 2(125,0)
  silkscreen extent -95,-32 95,34, body extent -135,-35 135,37, height 76
RES-SMD-0805 [mil]
  rect 39.37x55 smd: 1(-45,0) 2(45,0)
  silkscreen extent -70,-34 70,33, body extent -39,-25 39,25, height 31
RES-SMD-1210 [mm] "Chip Capacitor, Body 3.2x2.5mm, IPC Medium Density"
  rect 1.3x2.7 smd: 1(-1.397,0) 2(1.503,0)
  silkscreen extent -2.3,-1.6 2.4,1.6, body extent -1.6,-1.25 1.6,1.25, height 0.6
TO92-123 [mil] "TO-92"
  oval 66x100 hole 32: 1(-100,0) 2(0,0) 3(100,0)
  silkscreen extent -117,-65 120,118, body extent -109,-66 109,95, height 245